# Altium PCB VYLT_IOT_GATEWAY.PcbDoc
Units mm, origin at the board's own origin, x right, y up, seen from the top; angles counter-clockwise.
Board outline 137.1 x 87.1 mm, 4 copper layers (L1, L2, L3, L4), stack 1.58 mm thick; 18 components, 9 nets, 50 pads, 20 vias.
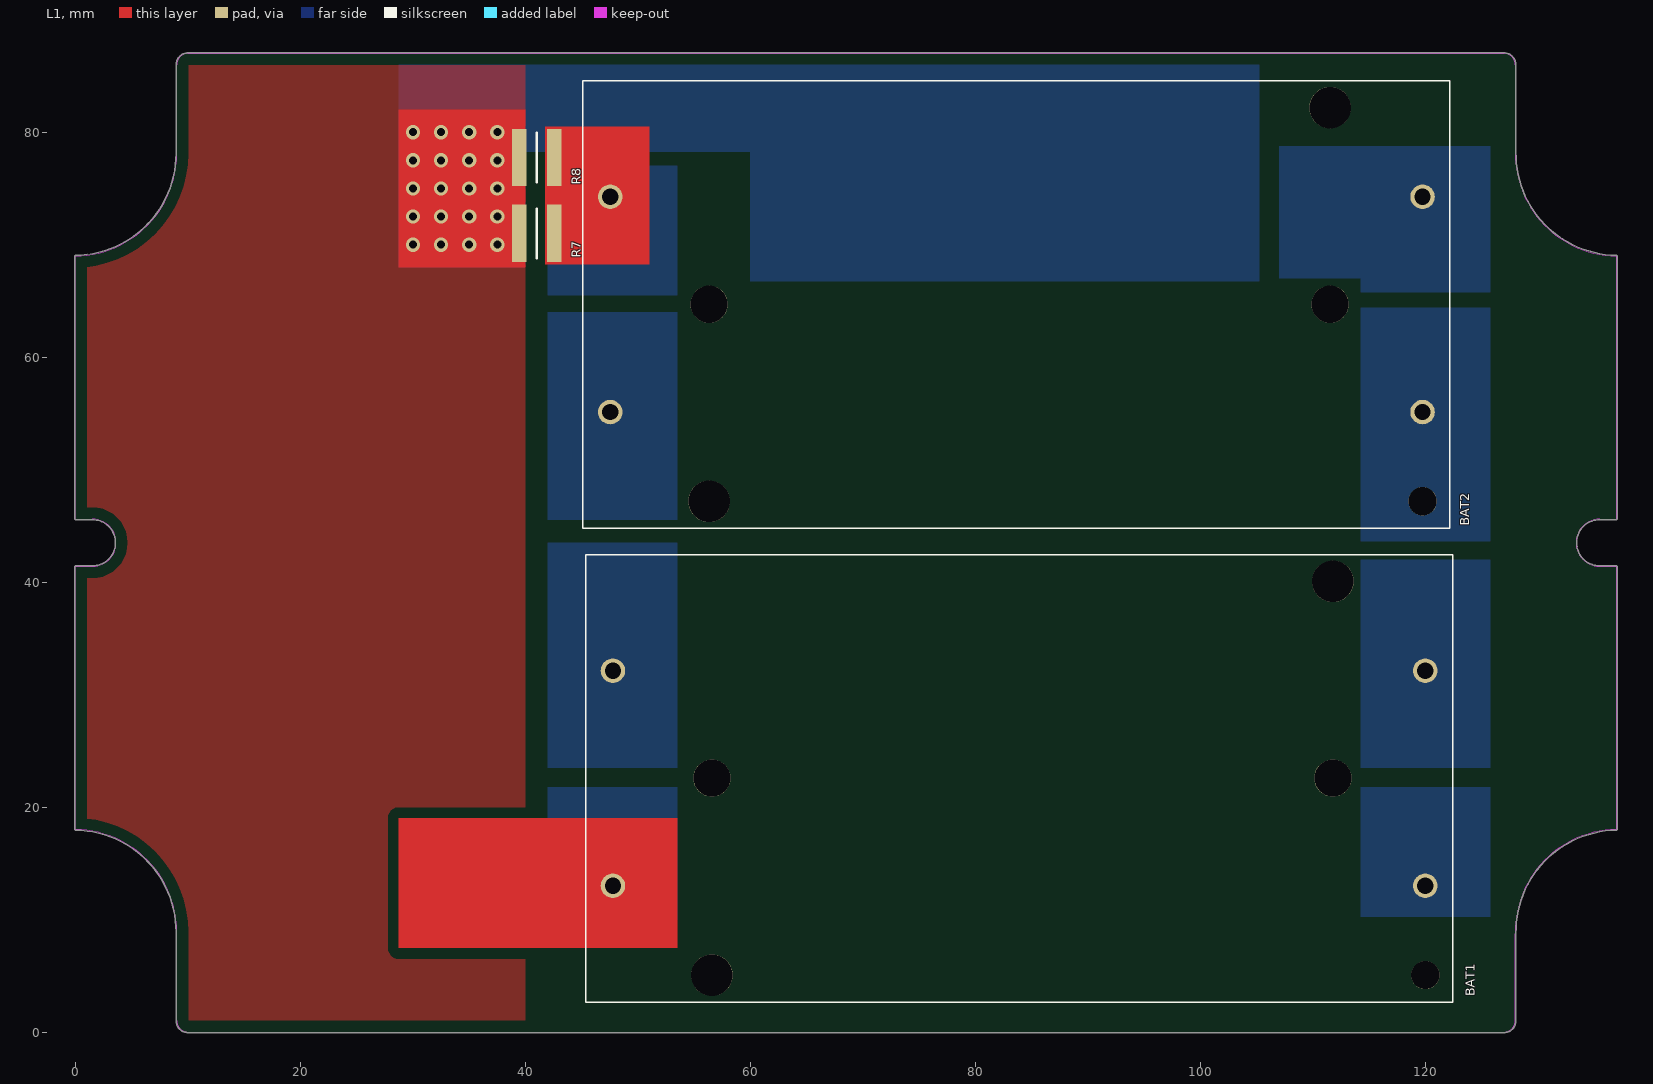
[diagram p0: L1 view]
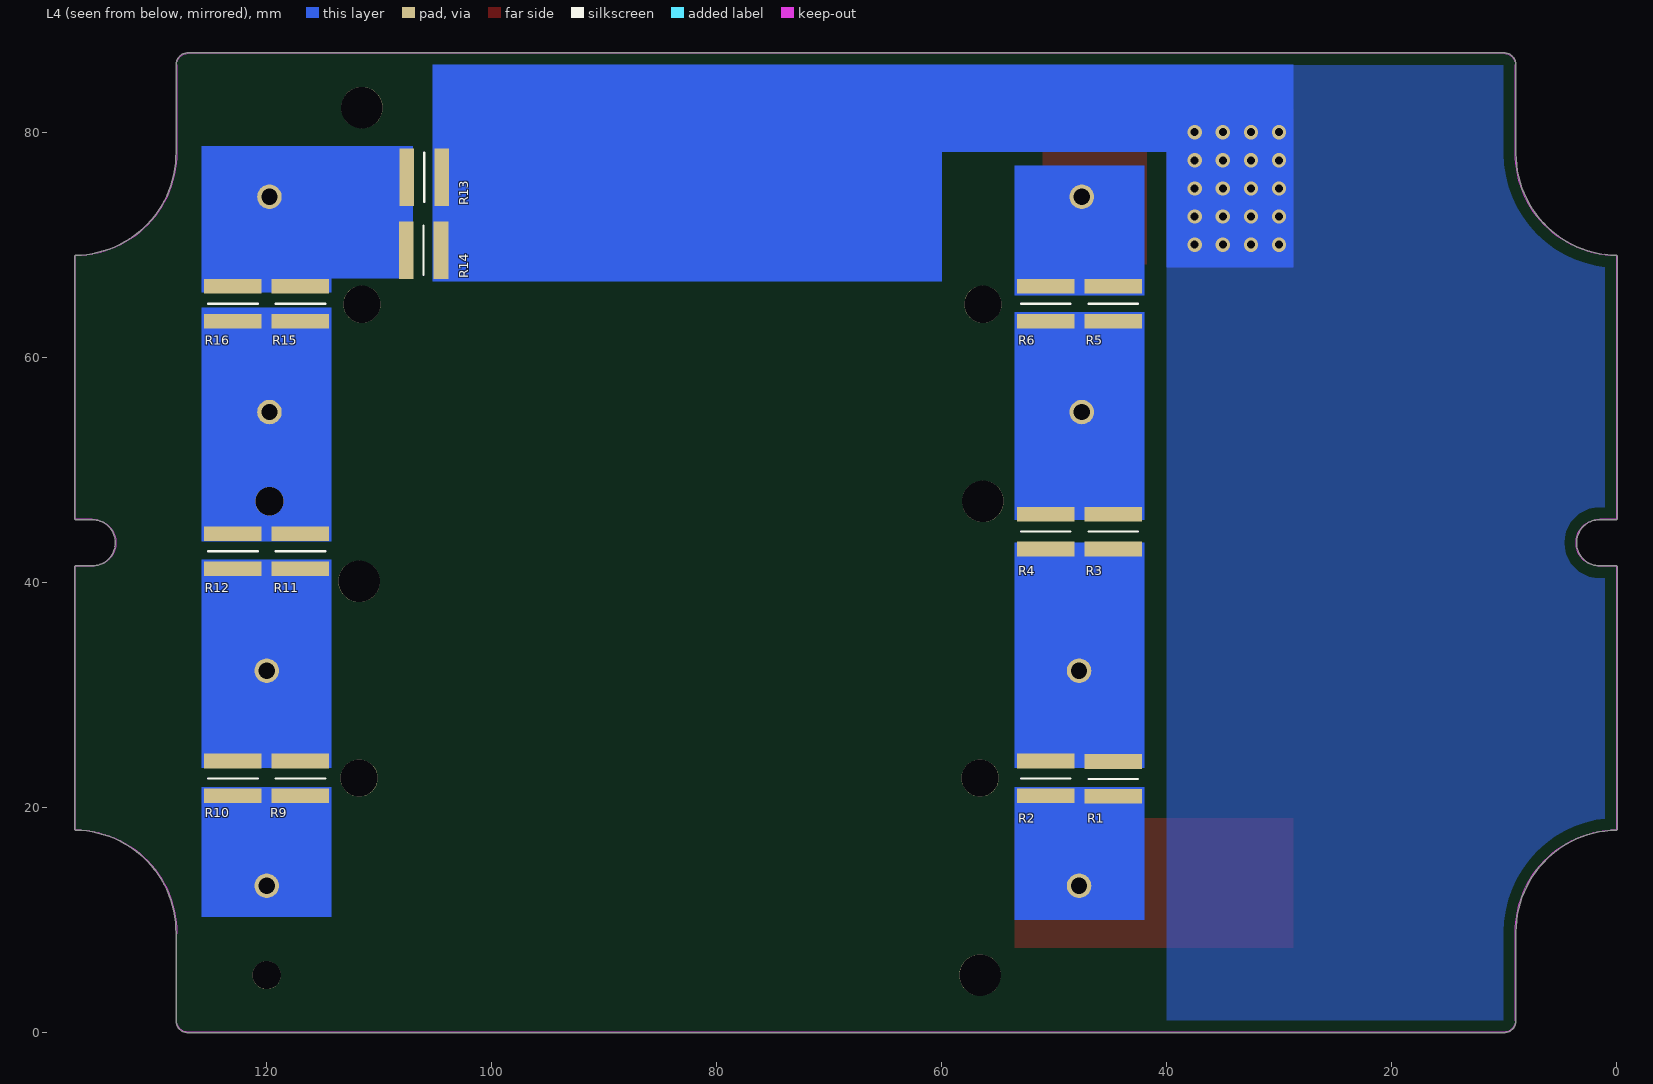
[diagram p1: L4 view, seen from below]
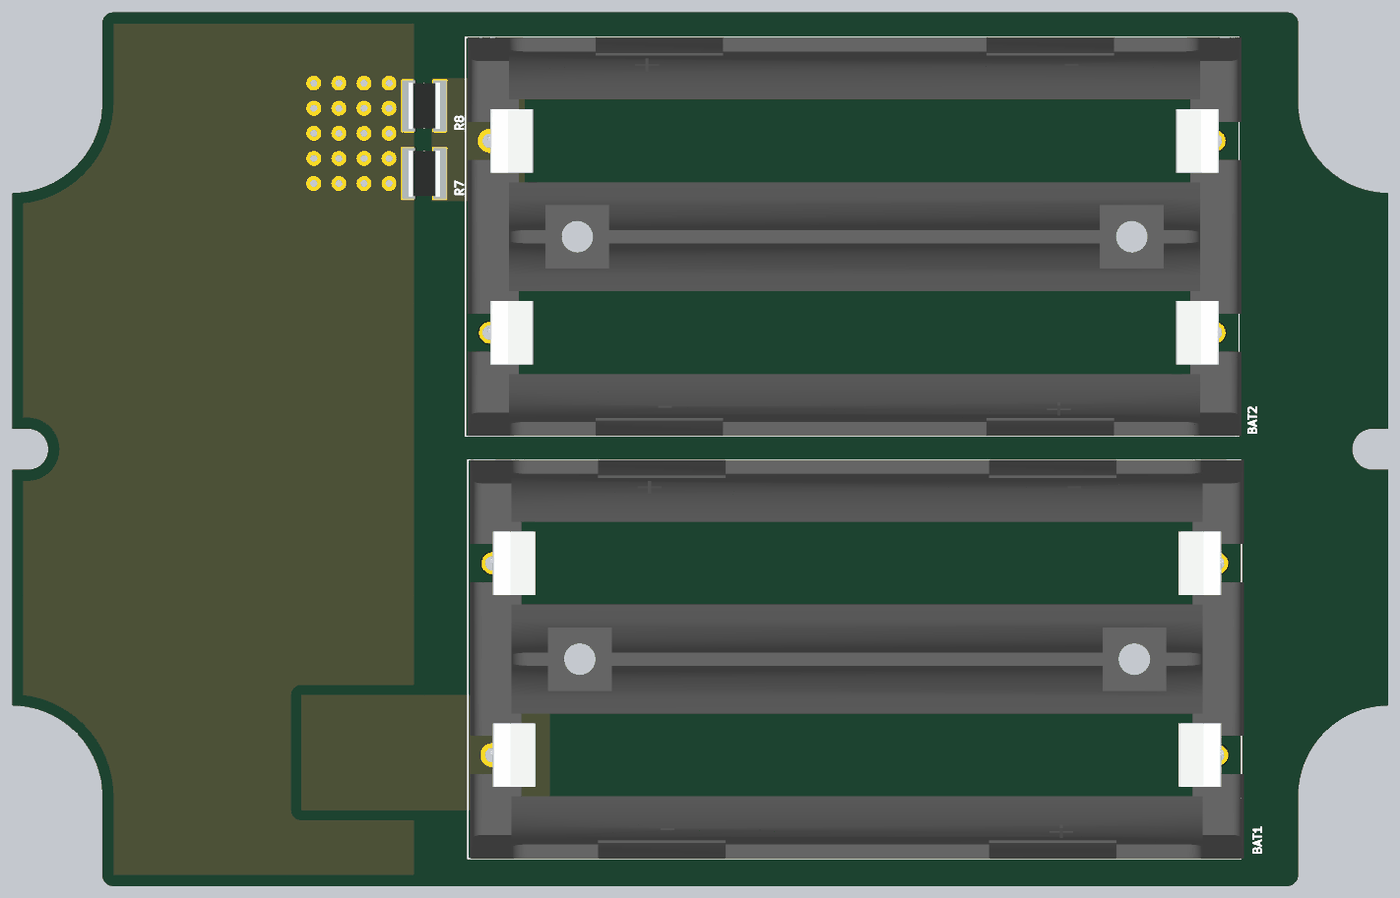
[diagram p2: 3D render of the assembled board from above, using the file's embedded part models]
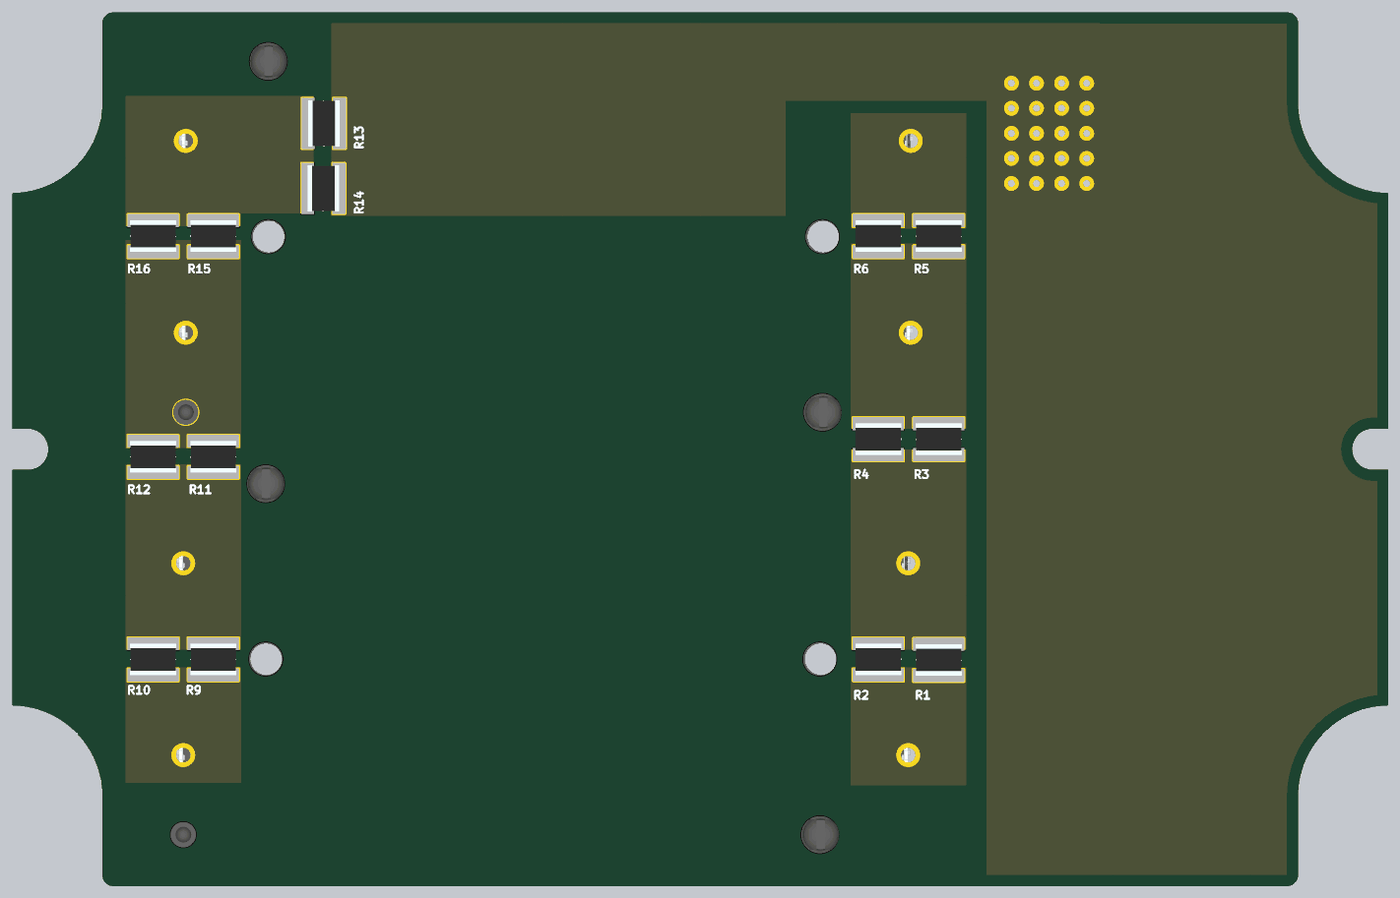
[diagram p3: 3D render of the assembled board from below, using the file's embedded part models]

## Layer stack, top to bottom
Top Solder: solder mask 0.01, Solder Resist, Dk 3.5
L1: signal copper 0.035
Dielectric 2: prepreg 0.12, PP-006, Dk 3.97
L2: signal copper 0.035
Dielectric 1: core 1.2, FR-4, Dk 4
L3: signal copper 0.035
Dielectric 3: prepreg 0.12, PP-006, Dk 3.97
L4: signal copper 0.035
Bottom Solder: solder mask 0.01, Solder Resist, Dk 3.5

## Board outline
-0.05,18.017 -0.05,41.4 0,41.45 1.5,41.45 1.501,41.45 ccw(c1.5,43.5) 3.55,43.5 ccw(c1.5,43.5) 1.5,45.55 0,45.55 -0.053,45.603 -0.053,69 -0.004,69.05 ccw(c-0.126,78.124) 8.947,78.124 8.947,78.247 8.947,85.997 8.95,86.014 cw(c10,86) 10,87.05 127,87.05 127.001,87.05 cw(c127,86) 128.05,86.014 128.053,85.997 128.054,78.247 128.054,78.246 ccw(c137.126,78.123) 137.003,69.051 137.05,68.983 137.05,45.6 137,45.55 135.5,45.55 135.499,45.55 ccw(c135.5,43.5) 135.5,41.45 137,41.45 137.05,41.4 137.05,18.017 137.004,17.95 ccw(c137.126,8.877) 128.053,8.754 128.053,8.753 128.053,1.003 128.05,0.986 cw(c127,1) 127,-0.05 10,-0.05 cw(c10,1) 8.95,0.986 8.947,1.003 8.947,8.753 8.947,8.877 ccw(c-0.126,8.877)

## Design rules (kind name [scope] priority, off if disabled: settings)
Clearance [All] p1: gap=0.254 ignorepadtopadclearanceinfootprint=FALSE except(0.178: SMDPad-SMDPad; 1: Arc-Poly Track-Poly SMDPad-Poly Poly-Region)
Height [All] p1: minheight=0 maxheight=55 prefheight=12.7
PolygonConnect [All] p1: connectstyle=Relief reliefconductorwidth=0.254 reliefentries=4 polygonreliefangle="90 Angle" airgapwidth=0.254
RoutingVias [All] p1: holewidth=0.711 width=1.27 viastyle="Through Hole" minholewidth=0.1 minwidth=0.1 maxholewidth=0.711 maxwidth=1.27
SolderMaskExpansion [All] p1: expansion=0.102 istentingtop=FALSE
SupplyNets "Schematic Supply Nets_9" [InNet('RTC_PWR')] p1: voltage=0.000
SupplyNets "Schematic Supply Nets_6" [InNet('3V3A_ESP')] p2: voltage=0.000
SupplyNets "Schematic Supply Nets_4" [InNet('3V3_ESP')] p3: voltage=0.000
SupplyNets "Schematic Supply Nets_2" [InNet('GND')] p4: voltage=0.000
Width [All] p1: maxlimit=0.254 minlimit=0.254 preferedwidth=0.254
29 further rules are at their usual default settings.

## Classes and differential pairs
net class R16_Nets: NetBAT2_2 NetBAT2_4
net class R15_Nets: NetBAT2_2 NetBAT2_4
net class R14_Nets: NetBAT2_2 VBUS_N
net class R13_Nets: NetBAT2_2 VBUS_N
net class R12_Nets: NetBAT1_2 NetBAT2_4
net class R11_Nets: NetBAT1_2 NetBAT2_4
net class R10_Nets: NetBAT1_2 NetBAT1_4
net class R9_Nets: NetBAT1_2 NetBAT1_4
net class R8_Nets: NetBAT2_1 VBUS_N
net class R7_Nets: NetBAT2_1 VBUS_N
net class R6_Nets: NetBAT2_1 NetBAT2_3
net class R5_Nets: NetBAT2_1 NetBAT2_3
net class R4_Nets: NetBAT1_1 NetBAT2_3
net class R3_Nets: NetBAT1_1 NetBAT2_3
net class R2_Nets: NetBAT1_1 VBUS_P
net class R1_Nets: NetBAT1_1 VBUS_P
net class BAT2_Nets: NetBAT2_1 NetBAT2_2 NetBAT2_3 NetBAT2_4
net class BAT1_Nets: NetBAT1_1 NetBAT1_2 NetBAT1_4 VBUS_P

## Components (designator, comment, footprint, x,y, rotation, side; value= is the part's Value field where it differs from the comment)
BAT1 "1049" 1049 83.89,22.565 r0 top locked
BAT2 "1049" 1049 83.64,64.685 r0 top locked
R1 "RES_1218_WIDE" RESC3246X06L 44.75,22.5 r270 bottom value=0R
R2 "RES_1218_WIDE" RESC3246X06L 50.75,22.55 r270 bottom value=0R
R3 "RES_1218_WIDE" RESC3246X06L 44.75,44.5 r270 bottom value=0R
R4 "RES_1218_WIDE" RESC3246X06L 50.75,44.5 r270 bottom value=0R
R5 "RES_1218_WIDE" RESC3246X06L 44.75,64.75 r270 bottom value=0R
R6 "RES_1218_WIDE" RESC3246X06L 50.75,64.75 r270 bottom value=0R
R7 "RES_1218_WIDE" RESC3246X06L 41,71 r0 top value=0R
R8 "RES_1218_WIDE" RESC3246X06L 41,77.75 r0 top value=0R
R9 "RES_1218_WIDE" RESC3246X06L 117,22.55 r270 bottom value=0R
R10 "RES_1218_WIDE" RESC3246X06L 123,22.55 r270 bottom value=0R
R11 "RES_1218_WIDE" RESC3246X06L 117,42.75 r270 bottom value=0R
R12 "RES_1218_WIDE" RESC3246X06L 123,42.75 r270 bottom value=0R
R13 "RES_1218_WIDE" RESC3246X06L 106,76 r0 bottom value=0R
R14 "RES_1218_WIDE" RESC3246X06L 106.05,69.5 r0 bottom value=0R
R15 "RES_1218_WIDE" RESC3246X06L 117,64.75 r270 bottom value=0R
R16 "RES_1218_WIDE" RESC3246X06L 123,64.75 r270 bottom value=0R

## Footprints (in the part's own frame and the unit in brackets; to place one, negate y for a bottom-side part, rotate by r counter-clockwise, add the part's x,y. Pads: shape width x height; smd on the part's side, far side on the other; paste and mask are expansions set on the pad)
1049 [mm] "BATT HOLDER 18650 2 CELL PC PIN"
  round 2.175 hole 1.45: 1(-36.11,9.565) 2(36.11,9.565) 3(-36.11,-9.565) 4(36.11,-9.565)
  round 3.68 hole 3.68 unplated: ""(-27.31,-17.5) ""(27.89,17.5)
  round 3.31 hole 3.31 unplated: ""(-27.31,0.015) ""(27.89,0.015)
  round 2.51 hole 2.51 unplated: ""(36.11,-17.5)
  silkscreen extent -38.53,-19.89 38.53,19.89, body extent -38.3,-19.88 38.76,19.89, height 14.91
RESC3246X06L [mm] "Chip Resistor, 2-Leads, Body 3.15x4.60mm, IPC High Density"
  rect 1.3x5.1 smd: 1(-1.55,0) 2(1.55,0)
  silkscreen extent 0,-2.2 0,2.2, body extent -1.58,-2.3 1.58,2.3, height 0.6

## Part data
BAT1 BAT2: "BATT HOLDER 18650 2 CELL PC PIN", Manufacturer 1="Keystone Electronics", Manufacturer Part Number 1=1049
R1 R2 R3 R4 R5 R6 R7 R8 R9 R10 R11 R12 R13 R14 R15 R16: "RES SMD 1W 1812 WIDE", Manufacturer 1="Vishay Dale", Manufacturer Part Number 1=RCL12180000Z0EK, Package=1218W

## Via types
v1: diameter 1.27, hole 0.711, L1 to L4, 20 vias

## Nets (pads, with @x,y where several pads share a name; then routed paths per layer and width w, separated by ;. In a path a pad name is that pad's centre, name@x,y a point inside that pad or via, vN(x,y) a via of type N, cw(c..) or ccw(c..) an arc to the next point about the centre after c; other vN are vias at no path point)
NetBAT1_1: BAT1.1 R1.1 R2.1 R3.2 R4.2
NetBAT1_2: BAT1.2 R9.1 R10.1 R11.2 R12.2
NetBAT1_4: BAT1.4 R9.2 R10.2
NetBAT2_1: BAT2.1 R5.1 R6.1 R7.2 R8.2
NetBAT2_2: BAT2.2 R13.2 R14.2 R15.1 R16.1
NetBAT2_3: BAT2.3 R3.1 R4.1 R5.2 R6.2
NetBAT2_4: BAT2.4 R11.1 R12.1 R15.2 R16.2
VBUS_N: R7.1 R8.1 R13.1 R14.1
  other v1: 30,70 32.5,70 35,70 37.5,70 30,72.5 32.5,72.5 35,72.5 37.5,72.5 30,75 32.5,75 35,75 37.5,75 30,77.5 32.5,77.5 35,77.5 37.5,77.5 30,80 32.5,80 35,80 37.5,80
VBUS_P: BAT1.3 R1.2 R2.2
pads on no net: BAT1. BAT2.

## Polygon pours and split planes (outlines as drawn)
no net on L2 "NONET_L-01_P-001" (solid, remove dead copper, shelved, pour order 0): -304,11.5 -274,11.5 -274,-18.5 -304,-18.5
VBUS_N on L1 "NONET_L-01_P-001" (solid, remove dead copper, pour order 73): 0,0 40,0 40,87 0,87
no net on L1 "NONET_L-01_P-001" (solid, remove dead copper, shelved, pour order 1): -304,11.5 -274,11.5 -274,-18.5 -304,-18.5
no net on L3 "NONET_L-01_P-001" (solid, remove dead copper, shelved, pour order 2): -304,11.5 -274,11.5 -274,-18.5 -304,-18.5
VBUS_N on L4 "NONET_L-01_P-001" (solid, remove dead copper, pour order 74): 0,0 40,0 40,87 0,87

## Keep-outs
Keep-Out Layer:
  lines w0.1: -0.003,18 cw(c-0.126,8.877) 8.997,8.753 8.997,1.003 ; -0.003,45.603 -0.003,69 ccw(c-0.126,78.124) 8.997,78.247 8.997,85.997 ; 0,18.003 0,41.4 1.5,41.4 ccw(c1.5,43.5) 1.5,45.6 0,45.6 ; 9,1 ccw(c10,1) 10,0 127,0 ccw(c127,1) 128,1 ; 9,86 cw(c10,86) 10,87 127,87 cw(c127,86) 128,86 ; 128.003,1.003 128.003,8.753 cw(c137.126,8.877) 137.003,18 ; 128.003,85.997 128.003,78.247 ccw(c137.126,78.123) 137.003,69 ; 137,18.003 137,41.4 135.5,41.4 cw(c135.5,43.5) 135.5,45.6 137,45.6 137,68.998 ; 137.003,69 137.003,69

## Other copper
L1:
  region net VBUS_P: 28.75,19 53.5,19 53.5,7.5 28.75,7.5
  region net VBUS_N: 28.75,82 28.75,68 40,68 40,82
  region net NetBAT2_1: 41.75,80.5 41.75,68.25 51,68.25 51,80.5
L4:
  region net VBUS_P: 42,21.75 53.5,21.75 53.5,10 42,10
  region net VBUS_N: 105.25,66.75 60,66.75 60,78.247 40,78.247 40,68 28.75,68 28.75,85.997 105.25,85.997
  region net NetBAT2_2: 107,78.75 107,67 115,67 115,78.75
  region net NetBAT2_2: 114.25,78.75 125.75,78.75 125.75,65.75 114.25,65.75
  region net NetBAT1_2: 114.25,42 125.75,42 125.75,23.5 114.25,23.5
  region net NetBAT1_4: 114.25,21.75 125.75,21.75 125.75,10.25 114.25,10.25
  region net NetBAT2_4: 114.25,64.375 125.75,64.375 125.75,43.625 114.25,43.625
  region net NetBAT2_3: 42,64 53.5,64 53.5,45.55 42,45.55
  region net NetBAT2_1: 42,77 53.5,77 53.5,65.5 42,65.5
  region net NetBAT1_1: 42,43.5 53.5,43.5 53.5,23.5 42,23.5

## Silkscreen, mask and mechanical layers (free items; w line width, h text height)
Dimensions:
  lines w0.1: 0,0 0,0
Mechanical 13:
  lines w0.2: 0,69 0,0 10,0 ; 41.5,22.5 56,22.55 ; 41.75,64.75 55.75,64.67 ; 47.53,74.25 47.53,55.12 47.78,32.13 47.78,13 ; 110.95,64.67 127.25,64.75 ; 111.2,22.55 129.75,22.5 ; 119.75,74.25 119.75,55.12 120,32.13 120,13